# EAGLE board controlador_18Fv1 (EAGLE 4.16)
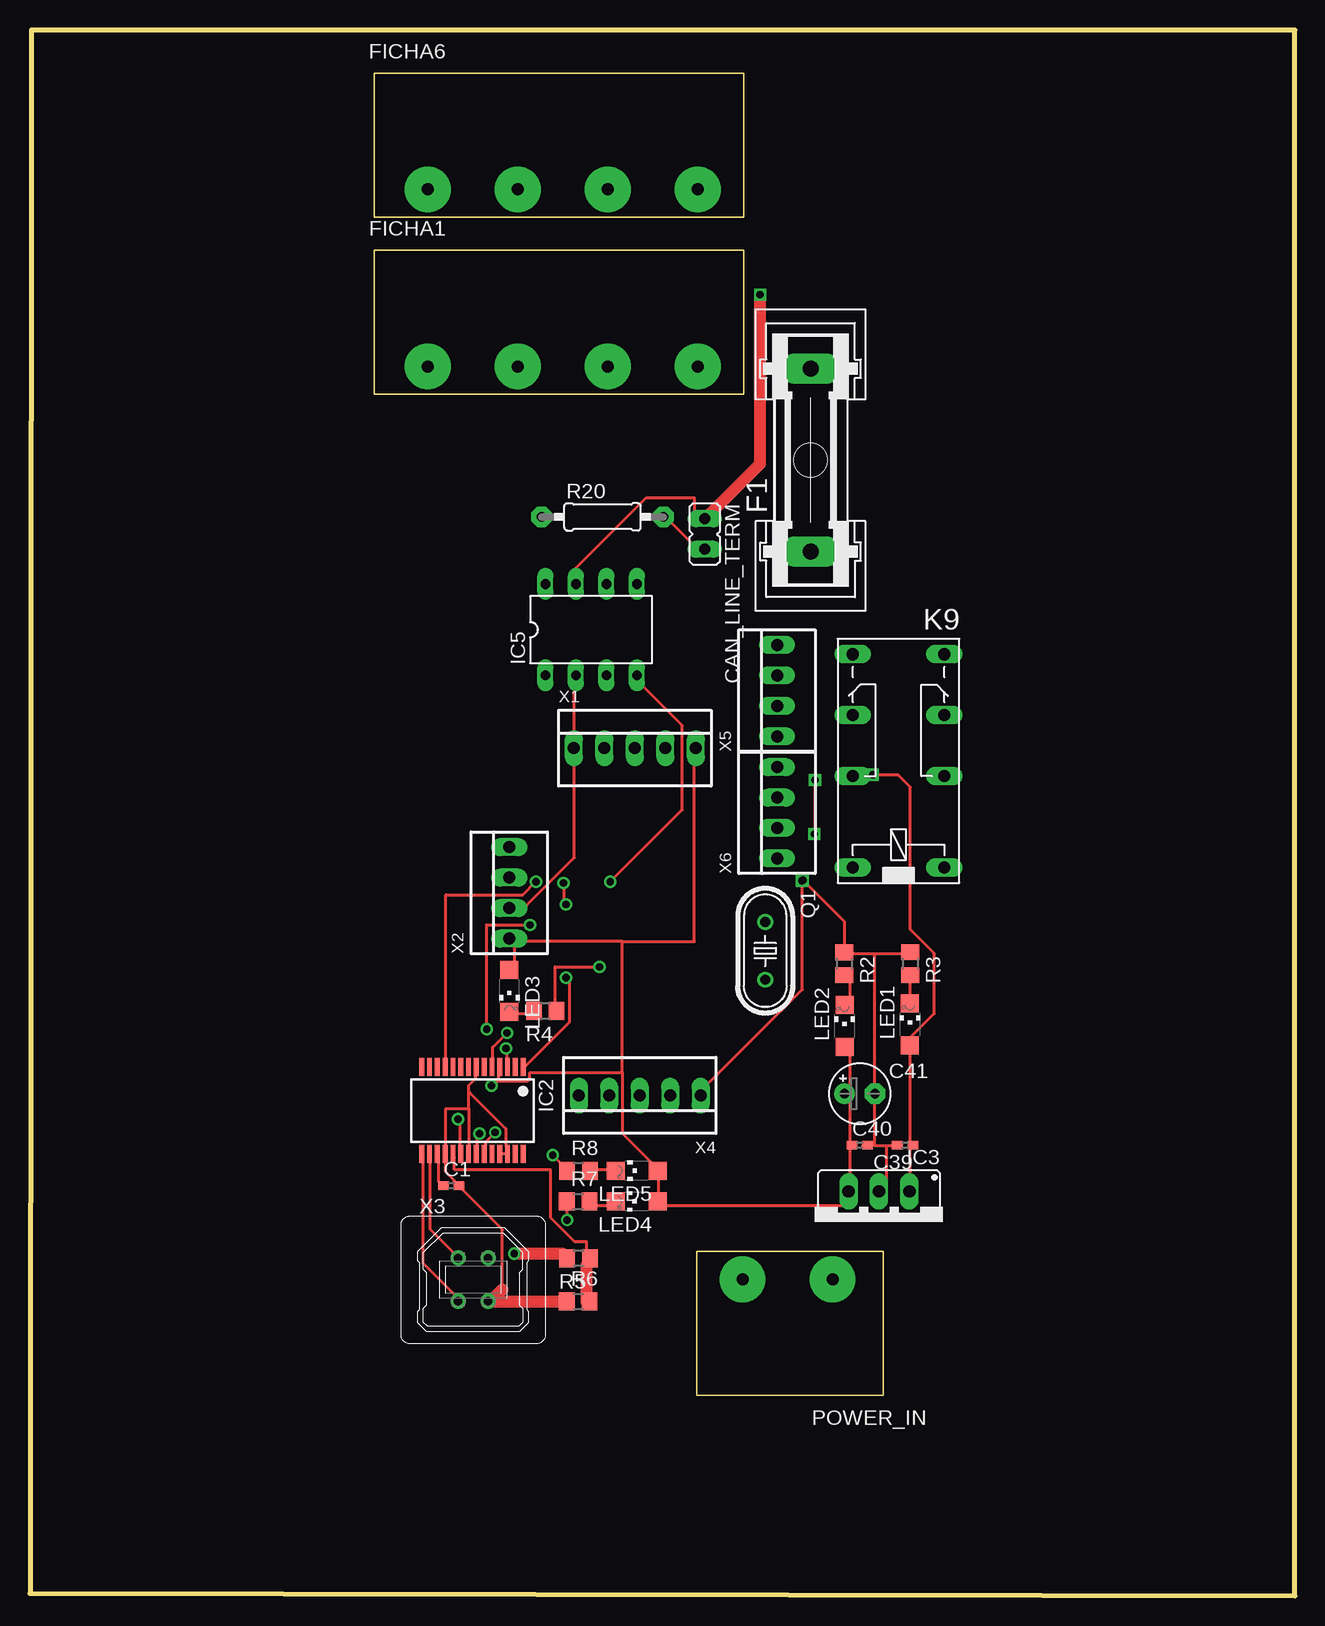
[diagram p0: board, top side]
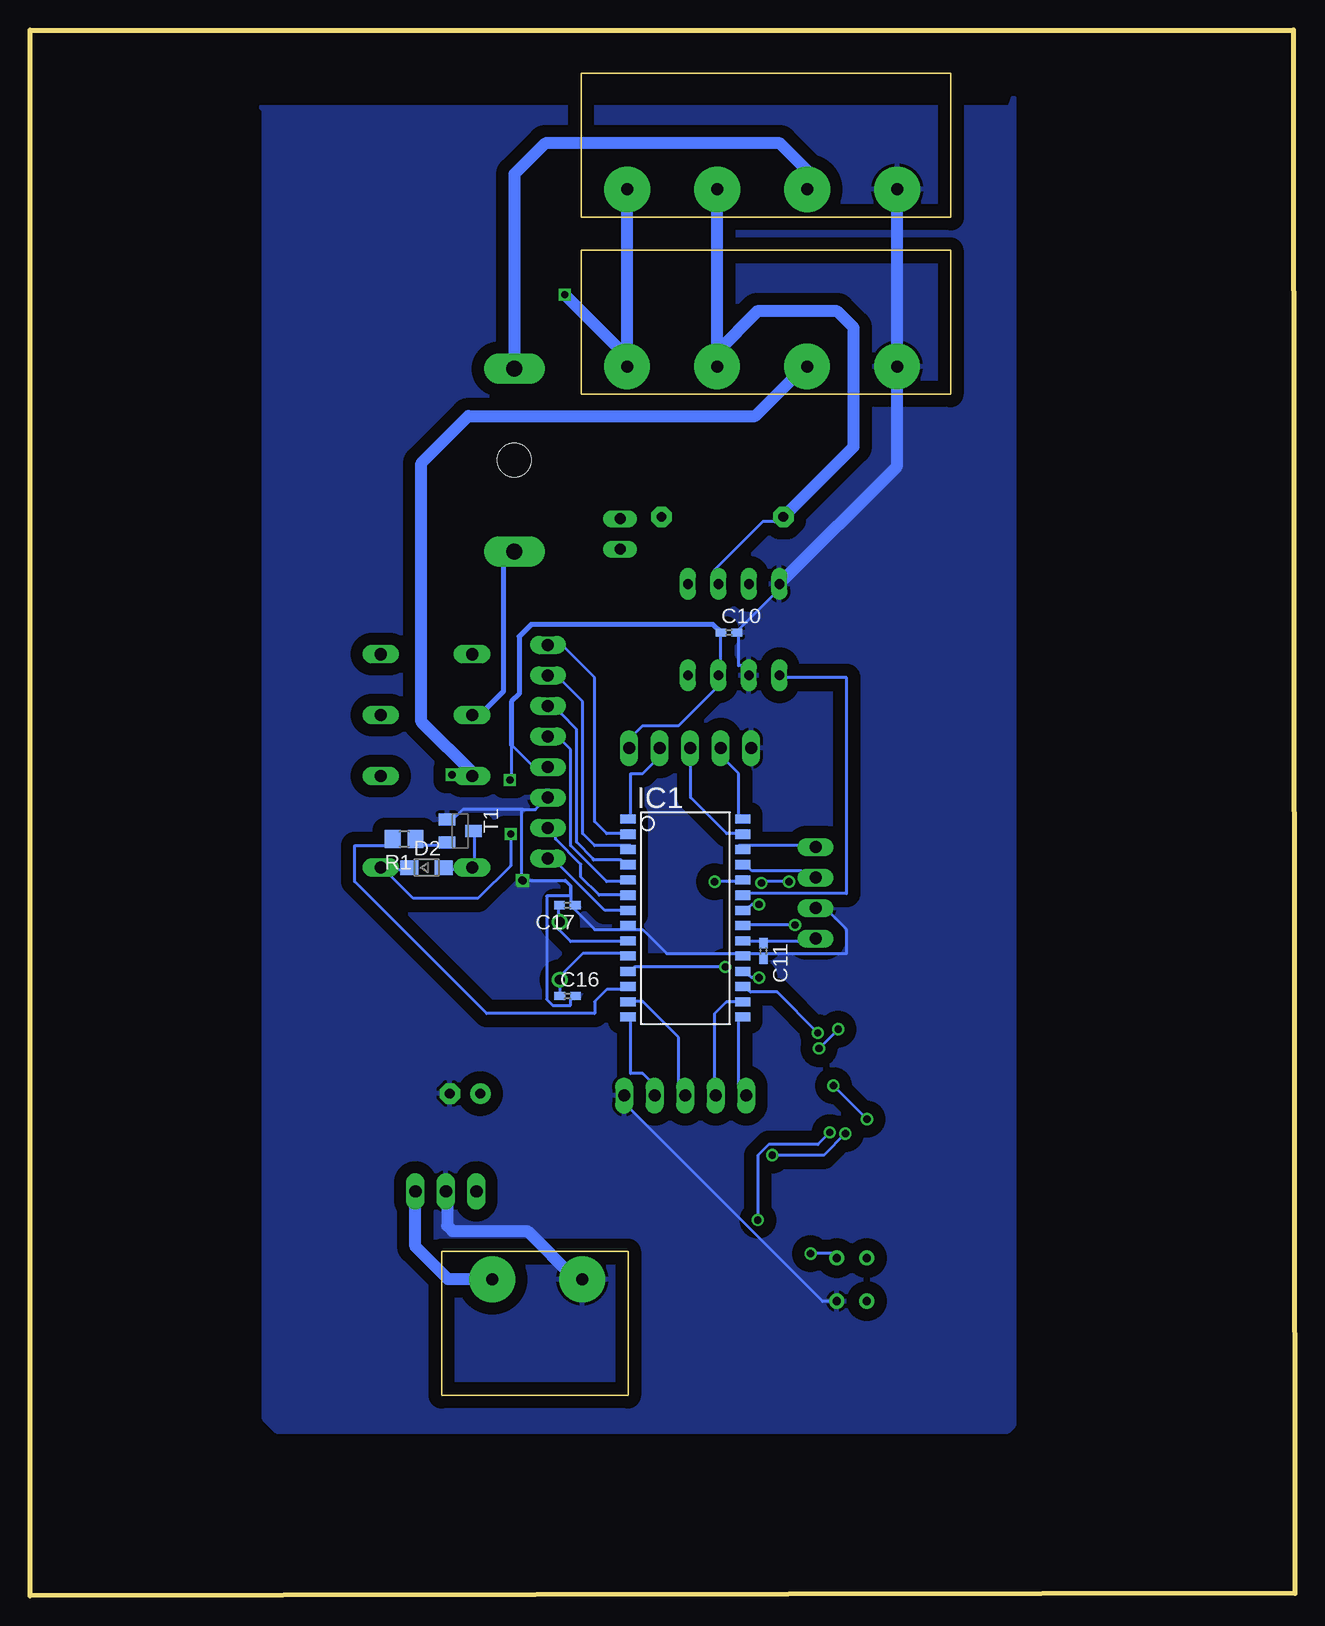
[diagram p1: board, bottom side, seen from below]

Size 105.41 x 130.54 mm. Coordinates in mm from the lower left corner, seen from the top.
Outline: 0.12,130.54 0,0.22 105.41,0 105.41,130.54 0.12,130.54
Copper layers (1*16): Top 0.035mm / dielectric 1.5mm / Bottom 0.035mm
Design rules "default": minimum track width 10mil, minimum drill 24mil, track to track 8mil, track to pad 8mil, pad to pad 8mil, via to via 8mil, smd to smd 8mil, copper to edge 40mil, drill to drill 8mil, minimum pad ring 10mil, minimum via ring 8mil, stop-mask expansion 4mil, vias tented up to drill 0mil, thermal gap 10mil

## Footprints (pad centres in the part's own frame; a part is rotated, then mirrored left to right if it is on the bottom)
C0402 = smd 0.9 x 0.7: 1 -0.65,0; 2 0.65,0
E2,5-5 = drill 0.813 pad 1.7 round: + -1.27,0 | drill 0.813 pad 1.7 octagon: - 1.27,0
JP1 = drill 0.914 long: 1 0,-1.27; 2 0,1.27
SOD323-W = smd 1.5 x 1.2: A 1.45,0; C -1.45,0
GSH15 = drill 1.321 pad 2.54 long: 1 -7.62,0; 2 7.62,0 | hole 2.794: 0,0
CAMDEN90GRAUS4PINOS = drill 1 pad 3.81 round: PIN0 3.81,-2.54; PIN1 11.31,-2.54; PIN2 18.81,-2.54; PIN3 26.31,-2.54
SO28W = smd 0.762 x 1.27: 1 -7.62,-4.78; 2 -6.35,-4.78; 3 -5.08,-4.78; 4 -3.81,-4.78; 5 -2.54,-4.78; 6 -1.27,-4.78; 7 0,-4.78; 8 1.27,-4.78; 9 2.54,-4.78; 10 3.81,-4.78; 11 5.08,-4.78; 12 6.35,-4.78; 13 7.62,-4.78; 14 8.89,-4.78; 15 8.89,4.78; 16 7.62,4.78; 17 6.35,4.78; 18 5.08,4.78; 19 3.81,4.78; 20 2.54,4.78; 21 1.27,4.78; 22 0,4.78; 23 -1.27,4.78; 24 -2.54,4.78; 25 -3.81,4.78; 26 -5.08,4.78; 27 -6.35,4.78; 28 -7.62,4.78
SSOP28 = smd 0.4 x 1.5: 1 -4.225,-3.625; 2 -3.575,-3.625; 3 -2.925,-3.625; 4 -2.275,-3.625; 5 -1.625,-3.625; 6 -0.975,-3.625; 7 -0.325,-3.625; 8 0.325,-3.625; 9 0.975,-3.625; 10 1.625,-3.625; 11 2.275,-3.625; 12 2.925,-3.625; 13 3.575,-3.625; 14 4.225,-3.625; 15 4.225,3.625; 16 3.575,3.625; 17 2.925,3.625; 18 2.275,3.625; 19 1.625,3.625; 20 0.975,3.625; 21 0.325,3.625; 22 -0.325,3.625; 23 -0.975,3.625; 24 -1.625,3.625; 25 -2.275,3.625; 26 -2.925,3.625; 27 -3.575,3.625; 28 -4.225,3.625
78XXS = drill 1.016 long: GND 0,-2.54; IN -2.54,-2.54; OUT 2.54,-2.54
DIL08 = drill 0.813 long: 1 -3.81,-3.81; 2 -1.27,-3.81; 3 1.27,-3.81; 4 3.81,-3.81; 5 3.81,3.81; 6 1.27,3.81; 7 -1.27,3.81; 8 -3.81,3.81
351 = drill 1.016 long: 1 -3.81,-3.81; 16 -3.81,3.81; O1 8.89,-3.81; O2 8.89,3.81; P1 3.81,-3.81; P2 3.81,3.81; S1 13.97,-3.81; S2 13.97,3.81
CHIPLED_1206 = smd 1.5 x 1.5: A 0,-1.75; C 0,1.75
CAMDEN90GRAUS2PINOS = drill 1 pad 3.81 round: PIN0 3.81,-2.54; PIN1 11.31,-2.54
HC49U-V = drill 0.813 round: 1 -2.413,0; 2 2.413,0
R0805 = smd 1.3 x 1.5: 1 -0.95,0; 2 0.95,0
0207/10 = drill 0.813 pad 1.7 octagon: 1 -5.08,0; 2 5.08,0
SOT23-EBC = smd 1 x 1.4: B 0.95,-1.1; C 0,1.1; E -0.95,-1.1
22-23-2051 = drill 1 long: 1 -5.08,0; 2 -2.54,0; 3 0,0; 4 2.54,0; 5 5.08,0
22-23-2041 = drill 1 long: 1 -3.81,0; 2 -1.27,0; 3 1.27,0; 4 3.81,0
85-32004-40X = drill 0.7 pad 1.27 round: 1 1.25,1.8; 2 -1.25,1.8; 3 -1.25,-1.8; 4 1.25,-1.8

## Placement (x,y rotation side)
C1  100n  [C0402]  35.1,34.2 0 top
C10  100n  [C0402]  47.17,80.31 0 bottom
C11  100n  [C0402]  44.3,53.77 270 bottom
C16  22pF  [C0402]  60.61,50.02 0 bottom
C17  22pF  [C0402]  60.63,57.58 180 bottom
C39  100n  [C0402]  72.93,37.57 180 top
C40  100n  [C0402]  69.15,37.57 0 top
C41  47u  [E2,5-5]  69.15,41.88 0 top
CAN_LINE_TERM  [JP1]  56.23,88.52 180 top
D2  [SOD323-W]  72.36,60.72 0 bottom
F1  FUSEGSH15  [GSH15]  65.05,94.68 90 top
FICHA1  CAMDEN90GRAUS4PINOS  [CAMDEN90GRAUS4PINOS]  59.46,99.95 180 top
FICHA6  CAMDEN90GRAUS4PINOS  [CAMDEN90GRAUS4PINOS]  59.45,114.71 180 top
IC1  PIC18F2580-E/SO  [SO28W]  50.8,57.15 270 bottom
IC2  FT232RL  [SSOP28]  36.87,40.47 180 top
IC3  [78XXS]  70.75,31.18 180 top
IC5  MCP2551  [DIL08]  46.77,80.55 0 top
K9  351  [351]  72.38,64.53 90 top
LED1  [CHIPLED_1206]  73.33,47.64 0 top
LED2  [CHIPLED_1206]  67.88,47.51 0 top
LED3  [CHIPLED_1206]  39.94,50.44 180 top
LED4  [CHIPLED_1206]  50.55,32.89 90 top
LED5  [CHIPLED_1206]  50.57,35.45 90 top
POWER_IN  CAMDEN90GRAUS2PINOS  [CAMDEN90GRAUS2PINOS]  55.57,28.94 0 top
Q1  10MHz  [HC49U-V]  61.27,53.78 270 top
R1  2k2  [R0805]  74.23,63.08 180 bottom
R2  560  [R0805]  67.86,52.69 270 top
R3  560  [R0805]  73.35,52.7 270 top
R4  560  [R0805]  42.94,48.76 180 top
R5  4K7  [R0805]  45.71,28.14 180 top
R6  10K-15SMD??  [R0805]  45.68,24.57 0 top
R7  270  [R0805]  45.68,32.89 0 top
R8  270  [R0805]  45.71,35.45 0 top
R20  120  [0207/10]  47.71,89.95 0 top
T1  [SOT23-EBC]  69.56,63.76 270 bottom
X1  22-23-2051  [22-23-2051]  50.4,70.68 0 top
X2  22-23-2041  [22-23-2041]  39.94,58.62 90 top
X3  MINI-USB_4P-85-32004-40X  [85-32004-40X]  36.93,26.37 0 top
X4  22-23-2051  [22-23-2051]  50.81,41.72 180 top
X5  22-23-2041  [22-23-2041]  62.25,75.47 90 top
X6  22-23-2041  [22-23-2041]  62.26,65.29 90 top

## Library data of the parts
C1 C10 C11 C16 C17 C39-C41 R1-R8 R20 = rcl
CAN_LINE_TERM = jumper
D2 = diode
F1 = fuse
FICHA1 FICHA6 POWER_IN = meus_componentes
IC1 = microchip
IC2 = ftdichip
IC3 = v-reg
IC5 = micro-philips
K9 = relay
LED1-LED5 = led
Q1 = crystal
T1 = transistor
X1 X2 X4-X6 = con-molex
X3 = con-cypressindustries

## Nets
+5V: C10.1 C11.1 C40.1 C41.+ D2.C IC1.20 IC2.4 IC2.20 IC3.OUT IC5.3 K9.1 LED2.A LED3.A LED4.A LED5.A X1.5 X2.1 X6.4
CAN_H: CAN_LINE_TERM.1 FICHA1.PIN0 FICHA6.PIN0 IC5.7
CAN_L: FICHA1.PIN1 FICHA6.PIN1 IC5.6 R20.1
CAN_RX(TTL): IC1.24 IC5.4
CAN_TX(TTL): IC1.23 IC5.1
CS: IC1.13 X4.3
DIN: IC1.16 X4.4
DOUT: IC1.15 X4.5
GND: C1.2 C10.2 C11.2 C16.2 C17.1 C39.2 C40.2 C41.- FICHA1.PIN3 FICHA6.PIN3 IC1.8 IC1.19 IC2.7 IC2.18 IC2.21 IC2.25 IC2.26 IC3.GND IC5.2 IC5.8 POWER_IN.PIN0 R2.1 R3.1 R6.1 T1.E X1.1 X2.2 X3.4 X4.1 X6.3
IO0: IC1.2 X5.4
IO1: IC1.3 X5.3
IO2: IC1.4 X5.2
IO3: IC1.5 X5.1
IO4: IC1.6 X6.2
IO5: IC1.7 X6.1
MCLR: IC1.1 X1.4
N$1: C16.1 IC1.10 Q1.2
N$2: C17.2 IC1.9 Q1.1
N$3: F1.1 K9.O2
N$4: F1.2 FICHA6.PIN2
N$5: IC2.16 X3.2
N$6: R1.1 T1.B
N$7: IC1.12 R1.2
N$8: IC2.15 X3.3
N$9: IC2.19 R5.1 R6.2
N$10: R5.2 X3.1
N$11: C1.1 IC2.17
N$13: LED4.C R7.2
N$14: LED5.C R8.2
N$15: IC2.23 R7.1
N$16: IC2.22 R8.1
N$20: LED3.C R4.2
N$21: IC1.11 R4.1
N$112: LED1.C R3.2
N$115: LED2.C R2.2
N$217: CAN_LINE_TERM.2 R20.2
OUT0: D2.A K9.16 T1.C
PGC: IC1.27 X1.3
PGD: IC1.28 X1.2
RB0: IC1.21 IC2.3
RB1: IC1.22 IC2.11
RS232_RX: IC1.18 IC2.1
RS232_RX2: IC1.26 X2.4
RS232_TX: IC1.17 IC2.5
RS232_TX2: IC1.25 X2.3
SCLK: IC1.14 X4.2
VCCIN: C39.1 FICHA1.PIN2 IC3.IN K9.P2 LED1.A POWER_IN.PIN1

## Tracks (layer width: path | path; a pad name or v marks a point on that pad's centre or on a via)
+5V  (via drill 0.6, 0.61)
  Top 0.254: LED2.A 68.36,45.54 68.36,42.54 C41.+ 68.36,41.54 68.36,37.54 | 52.36,35.54 52.36,33.54 LED4.A 52.36,32.54 68.36,32.54 IC3.OUT 68.36,34.54 68.36,37.54 | 68.36,37.54 C40.1 | LED3.A 40.36,52.54 40.36,54.54 X2.1 41.36,54.54 49.36,54.54 | 49.36,54.54 55.36,54.54 55.36,69.54 X1.5 | 52.36,35.54 49.36,38.54 49.36,43.64 | 49.36,43.64 49.36,54.54 | 52.36,35.54 LED5.A | v35.66,39.74 35.86,39.54 35.86,37.54 IC2.20 | 38.91,42.99 39.06,43.14 39.06,43.44 IC2.4 | v38.46,42.54 38.91,42.99 | 49.36,43.64 41.66,43.64 41.66,43.14 41.46,42.94 38.96,42.94 38.91,42.99 | v65.42,68.01 65.42,63.58 v65.36,63.52
  Bottom 0.254: 44.36,54.54 46.36,54.54 IC1.20 | 44.36,54.54 41.36,54.54 X2.1 | 44.36,54.54 C11.1 | D2.C 74.36,60.54 75.36,60.54 K9.1 76.05,60.73 73.47,58.14 68.09,58.14 65.36,60.87 v65.36,63.52 | X1.5 55.36,71.54 54.36,72.54 51.36,72.54 48.36,75.54 IC5.3 47.86,78.04 47.86,80.04 C10.1 | v35.66,39.74 v38.46,42.54 | X6.4 63.42,69.1 65.29,70.97 65.29,68.13 v65.42,68.01
  Bottom 0.406: 65.29,70.97 65.29,74.56 64.66,75.19 64.66,79.98 63.64,81 48.49,81 C10.1 | C10.1 47.8,80.3 | C10.1
CAN_H  (via drill 0.6)
  Top 0.254: IC5.7 45.36,85.54 51.36,91.54 55.36,91.54 55.36,89.54 CAN_LINE_TERM.1
  Top 1.016: CAN_LINE_TERM.1 56.26,89.79 60.84,94.38 v60.84,108.47
  Bottom 1.016: 55.45,102.49 55.34,102.39 | 55.45,102.49 FICHA1.PIN0 55.65,103.29 v60.84,108.47 | FICHA6.PIN0 55.64,102.68 55.45,102.49
CAN_L
  Bottom 0.254: IC5.6 48.36,85.54 44.36,89.54 43.36,89.54 R20.1
  Bottom 1.016: 48.14,102.23 48.15,102.24 FICHA1.PIN1 48.15,103.74 44.81,107.08 38.15,107.08 36.78,105.72 36.78,95.8 R20.1 | 48.14,102.23 FICHA6.PIN1 | 48.14,102.23 48,102.08
CAN_RX(TTL)  (via drill 0.61)
  Top 0.254: v48.36,59.54 54.36,65.54 54.36,72.54 50.36,76.54 IC5.4
  Bottom 0.254: v48.36,59.54 46.36,59.54 IC1.24
CAN_TX(TTL)
  Bottom 0.254: IC1.23 46.36,58.54 37.36,58.54 37.36,76.54 42.36,76.54 IC5.1
CS
  Bottom 0.254: IC1.13 55.36,49.54 54.36,49.54 51.36,46.54 51.36,42.54 X4.3
DIN
  Bottom 0.254: IC1.16 46.36,49.54 47.36,49.54 48.36,48.54 48.36,42.54 X4.4
DOUT
  Bottom 0.254: IC1.15 46.36,48.54 46.36,42.54 X4.5
GND  (via drill 0.6)
  Top 0.254: 35.36,34.54 39.36,30.54 39.36,25.54 | 35.36,34.54 C1.2 | 44.36,24.54 R6.1 | X3.4 38.36,24.54 | X2.2 41.36,57.54 45.36,61.54 45.36,69.54 X1.1 45.36,71.54 45.36,75.54 IC5.2 | 71.36,37.54 72.36,37.54 C39.2 | 70.36,37.54 71.36,37.54 | 70.36,37.54 69.36,37.54 C40.2 | 71.36,37.54 71.36,34.54 IC3.GND | 70.36,53.54 73.36,53.54 R3.1 | 70.36,53.54 68.36,53.54 R2.1 67.86,56.22 v64.41,59.67 64.37,59.63 v64.32,59.63 64.36,59.59 64.36,50.54 56.36,42.54 X4.1 | 70.36,53.54 70.36,42.54 C41.- 70.36,41.54 70.36,37.54 | IC2.25 39.26,36.84 39.66,36.84 IC2.26 39.66,37.54 39.66,38.94 36.66,41.94 36.56,41.94 | 36.56,41.94 36.56,42.54 37.16,43.14 37.16,43.44 IC2.7 | 36.56,40.64 36.56,41.94 | 36.56,40.64 36.56,37.54 IC2.21 | 35.36,34.54 35.36,34.64 34.66,35.34 34.66,36.14 IC2.18 34.66,37.54 34.66,40.64 36.56,40.64
  Top 1.016: 39.36,25.54 38.36,24.54 44.36,24.54
  Bottom 0.254: X4.1 55.36,40.54 39.36,24.54 38.36,24.54 X3.4 | 46.36,80.54 46.36,77.54 45.36,77.54 IC5.2 | 46.36,80.54 43.36,83.54 IC5.8 | 46.36,80.54 C10.2 | 46.36,53.54 44.36,53.54 | 60.36,57.54 58.36,55.54 55.36,55.54 | 46.36,53.54 52.36,53.54 54.36,55.54 55.36,55.54 | 46.36,53.54 IC1.19 | 55.36,55.54 IC1.8 | 64.36,65.54 69.36,65.54 70.36,64.54 T1.E | 60.36,57.54 60.36,58.34 62.36,58.34 62.36,49.74 61.86,49.24 60.36,49.24 60.36,49.74 C16.2 | 60.36,57.54 C17.1 | 44.36,53.54 37.36,53.54 37.36,55.54 39.36,57.54 X2.2 | 44.36,53.54 C11.2 | 60.82,59.63 60.86,59.58 60.9,59.63 v64.32,59.63 | 60.82,59.63 | 64.36,65.57 64.34,65.59 | 64.36,65.57 64.36,65.54 | v64.41,59.67 64.41,65.52 64.36,65.57 | X6.3 62.27,66.57 63.3,65.54 64.36,65.54
  Bottom 0.305: 60.36,58.34 60.36,59.17 60.82,59.63
  Bottom 1.016: POWER_IN.PIN0 59.96,26.4 63.98,30.42 70.19,30.42 70.65,30.87 70.65,33.52 70.8,33.68 IC3.GND | FICHA6.PIN3 33.14,102.7 33.3,102.54 33.25,102.49 FICHA1.PIN3 33.15,94.2 42.96,84.39 IC5.8
  pour Bottom (isolate 1.016): 23.44,124.92 23.44,14.23 23.98,13.69 84.8,13.69 85.88,14.78 85.88,123.83 86.16,124.11 23.71,124.11
IO0
  Bottom 0.254: IC1.2 55.36,63.54 57.36,63.54 58.36,64.54 58.36,76.54 61.36,79.54 X5.4
IO1
  Bottom 0.254: IC1.3 55.36,62.54 58.36,62.54 59.36,63.54 59.36,74.54 61.36,76.54 X5.3
IO2
  Bottom 0.254: IC1.4 56.16,61.34 58.46,61.34 58.46,61.44 59.86,62.84 59.86,72.24 61.16,73.54 X5.2
IO3
  Bottom 0.254: IC1.5 55.36,59.54 57.36,59.54 60.36,62.54 60.36,70.54 61.36,71.54 X5.1
IO4
  Bottom 0.254: IC1.6 57.99,58.42 59.5,59.93 59.5,60.98 61.61,63.09 61.61,63.35 62.26,64 62.29,64 62.3,64.01 62.3,64.02 X6.2
IO5
  Bottom 0.254: X6.1 61.99,61.48 61.91,61.55 57.51,57.15 IC1.7
MCLR
  Bottom 0.254: IC1.1 55.36,64.54 55.36,68.54 54.36,68.54 53.36,69.54 X1.4
N$1
  Bottom 0.254: IC1.10 55.36,53.54 59.36,53.54 61.36,51.54 Q1.2 61.26,50.74 61.26,50.34 C16.1
N$2
  Bottom 0.254: C17.2 61.36,57.54 61.36,56.54 Q1.1 61.36,55.54 60.36,54.54 55.36,54.54 IC1.9
N$3
  Bottom 0.406: K9.O2 67.95,73.43 65.94,75.43 65.94,85.92 65.03,86.83 65.05,86.86 F1.1
N$4
  Bottom 1.016: FICHA6.PIN2 40.64,118.82 42.92,121.1 62.46,121.1 65.04,118.52 65.04,102.61 64.89,102.46 F1.2
N$5
  Top 0.254: IC2.16 33.36,36.54 33.36,30.54 35.36,28.54 X3.2
N$6
  Bottom 0.254: T1.B 70.36,62.54 73.36,62.54 R1.1
N$7
  Bottom 0.254: IC1.12 55.36,50.54 57.36,50.54 58.36,49.54 58.36,48.54 67.36,48.54 78.36,59.54 78.36,62.54 75.36,62.54 R1.2
N$8
  Top 0.254: IC2.15 32.76,36.14 32.76,27.74 35.36,25.14 X3.3
N$9
  Top 0.254: 46.36,24.54 R6.2 | 46.36,27.54 R5.1 46.36,28.54 46.36,29.54 45.36,29.54 43.36,31.54 43.36,35.54 35.36,35.54 35.36,36.54 IC2.19
  Top 1.016: 46.36,27.54 46.36,24.54
N$10  (via drill 0.61)
  Top 0.254: 44.36,28.54 R5.2
  Top 1.016: v40.36,28.54 44.36,28.54
  Bottom 0.254: v40.36,28.54 38.36,28.54 X3.1
N$11
  Top 0.254: C1.1 34.06,34.54 34.06,36.14 IC2.17
N$13
  Top 0.254: R7.2 46.36,32.54 48.36,32.54 LED4.C
N$14
  Top 0.254: LED5.C 48.36,35.54 46.36,35.54 R8.2
N$15  (via drill 0.61)
  Top 0.254: v38.76,38.64 37.96,37.84 37.96,37.54 IC2.23 | v44.76,31.34 44.76,32.14 R7.1
  Bottom 0.254: v38.76,38.64 39.76,37.64 43.86,37.64 44.76,36.74 v44.76,31.34
N$16  (via drill 0.61)
  Top 0.254: v37.46,38.54 37.26,38.34 37.26,37.54 IC2.22 | v43.56,36.74 44.16,36.14 R8.1
  Bottom 0.254: v37.46,38.54 39.26,36.74 v43.56,36.74
N$20
  Top 0.254: LED3.C 40.36,48.54 41.36,48.54 R4.2
N$21  (via drill 0.61)
  Top 0.254: v47.46,52.44 43.76,52.44 43.76,49.44 R4.1
  Bottom 0.254: v47.46,52.44 54.96,52.44 IC1.11
N$112
  Top 0.254: LED1.C 73.36,49.54 73.36,51.54 R3.2
N$115
  Top 0.254: R2.2 68.36,51.54 68.36,49.54 LED2.C
N$217
  Top 0.254: CAN_LINE_TERM.2 55.36,87.54 53.36,89.54 R20.2
OUT0
  Bottom 0.254: T1.C 68.36,63.54 68.36,60.54 K9.16 69.36,60.54 70.36,60.54 D2.A
PGC
  Bottom 0.254: IC1.27 46.36,63.54 47.36,63.54 50.36,66.54 50.36,69.54 X1.3
PGD
  Bottom 0.254: IC1.28 46.36,64.54 46.36,68.54 47.36,69.54 X1.2
RB0  (via drill 0.61)
  Top 0.254: v41.66,55.94 38.06,55.94 v38.06,47.24 | v39.66,45.64 39.76,45.54 39.76,44.84 IC2.3
  Bottom 0.254: v41.66,55.94 45.46,55.94 IC1.21 | v39.66,45.64 v38.06,47.24
RB1  (via drill 0.61)
  Top 0.254: v44.66,57.64 44.46,57.84 v44.46,59.44 | v42.16,59.54 41.06,58.44 34.66,58.44 34.66,44.84 IC2.11
  Bottom 0.254: v44.66,57.64 45.26,57.64 45.46,57.44 IC1.22 | v44.46,59.44 44.36,59.54 v42.16,59.54
RS232_RX  (via drill 0.61)
  Top 0.254: v44.66,51.54 44.96,51.24 44.96,47.84 41.26,44.14 IC2.1
  Bottom 0.254: v44.66,51.54 45.26,51.54 45.46,51.74 IC1.18
RS232_RX2
  Bottom 0.254: IC1.26 46.36,62.54 41.36,62.54 X2.4
RS232_TX  (via drill 0.61)
  Top 0.254: v39.76,46.94 38.56,45.74 38.56,44.84 IC2.5
  Bottom 0.254: v39.76,46.94 43.16,50.34 45.36,50.34 45.46,50.44 IC1.17
RS232_TX2
  Bottom 0.254: IC1.25 45.46,60.64 45.26,60.44 41.16,60.44 X2.3
SCLK
  Bottom 0.254: IC1.14 55.36,48.54 55.36,43.54 54.36,43.54 53.36,42.54 X4.2
VCCIN  (via drill 0.6)
  Top 0.254: 73.36,37.54 73.36,34.54 IC3.IN | 73.36,37.54 73.36,45.54 LED1.A 73.36,46.54 75.36,48.54 75.36,53.54 73.36,55.54 73.36,67.43 72.37,68.42 70.27,68.42 v70.24,68.45 | 73.36,37.54 C39.1
  Bottom 0.254: K9.P2 68.69,68.45 v70.24,68.45
  Bottom 1.016: POWER_IN.PIN1 70.56,26.4 73.3,29.13 73.3,33.6 73.29,33.61 IC3.IN | FICHA1.PIN2 40.86,102.49 44.99,98.37 68.87,98.37 72.8,94.43 72.8,72.87 68.4,68.47 68.53,68.35 K9.P2